# Altium PCB CH32V203G-R0-1v0.PcbDoc
Units mil, origin at the board's own origin, x right, y up, seen from the top; angles counter-clockwise.
Board outline 1496.06 x 2440.94 mil, 2 copper layers (Top Layer, Bottom Layer); 28 components, 39 nets, 142 pads, 298 vias.
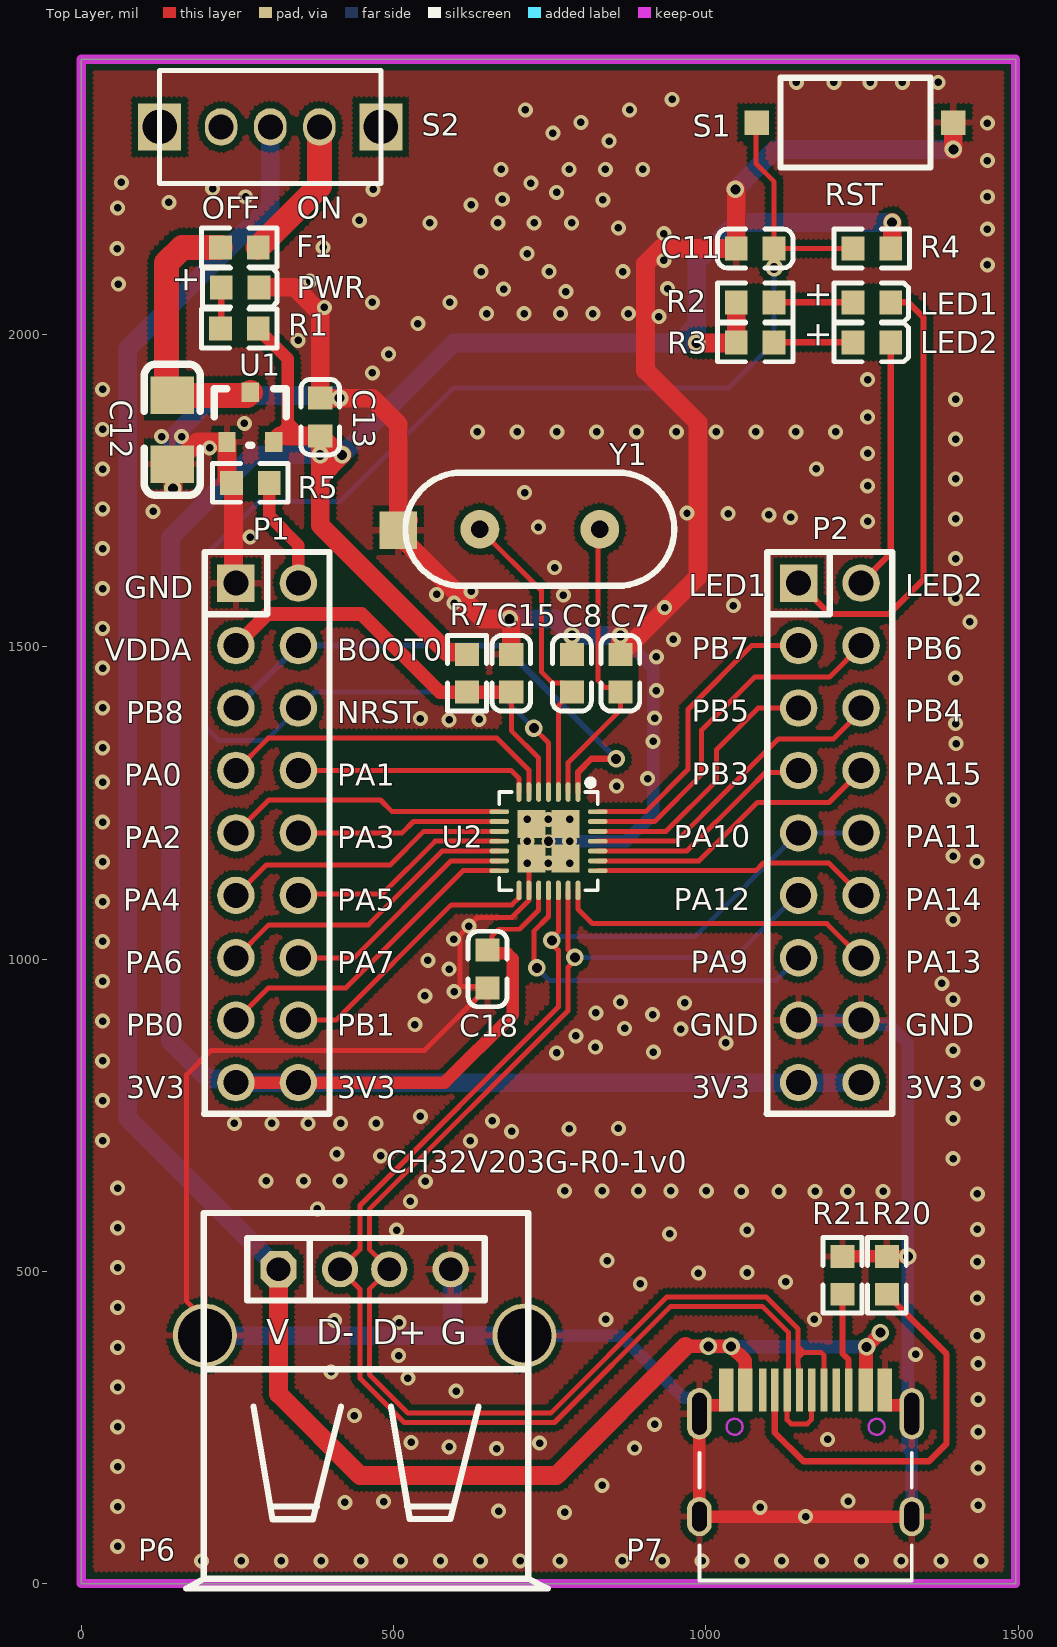
[diagram p0: Top Layer view]
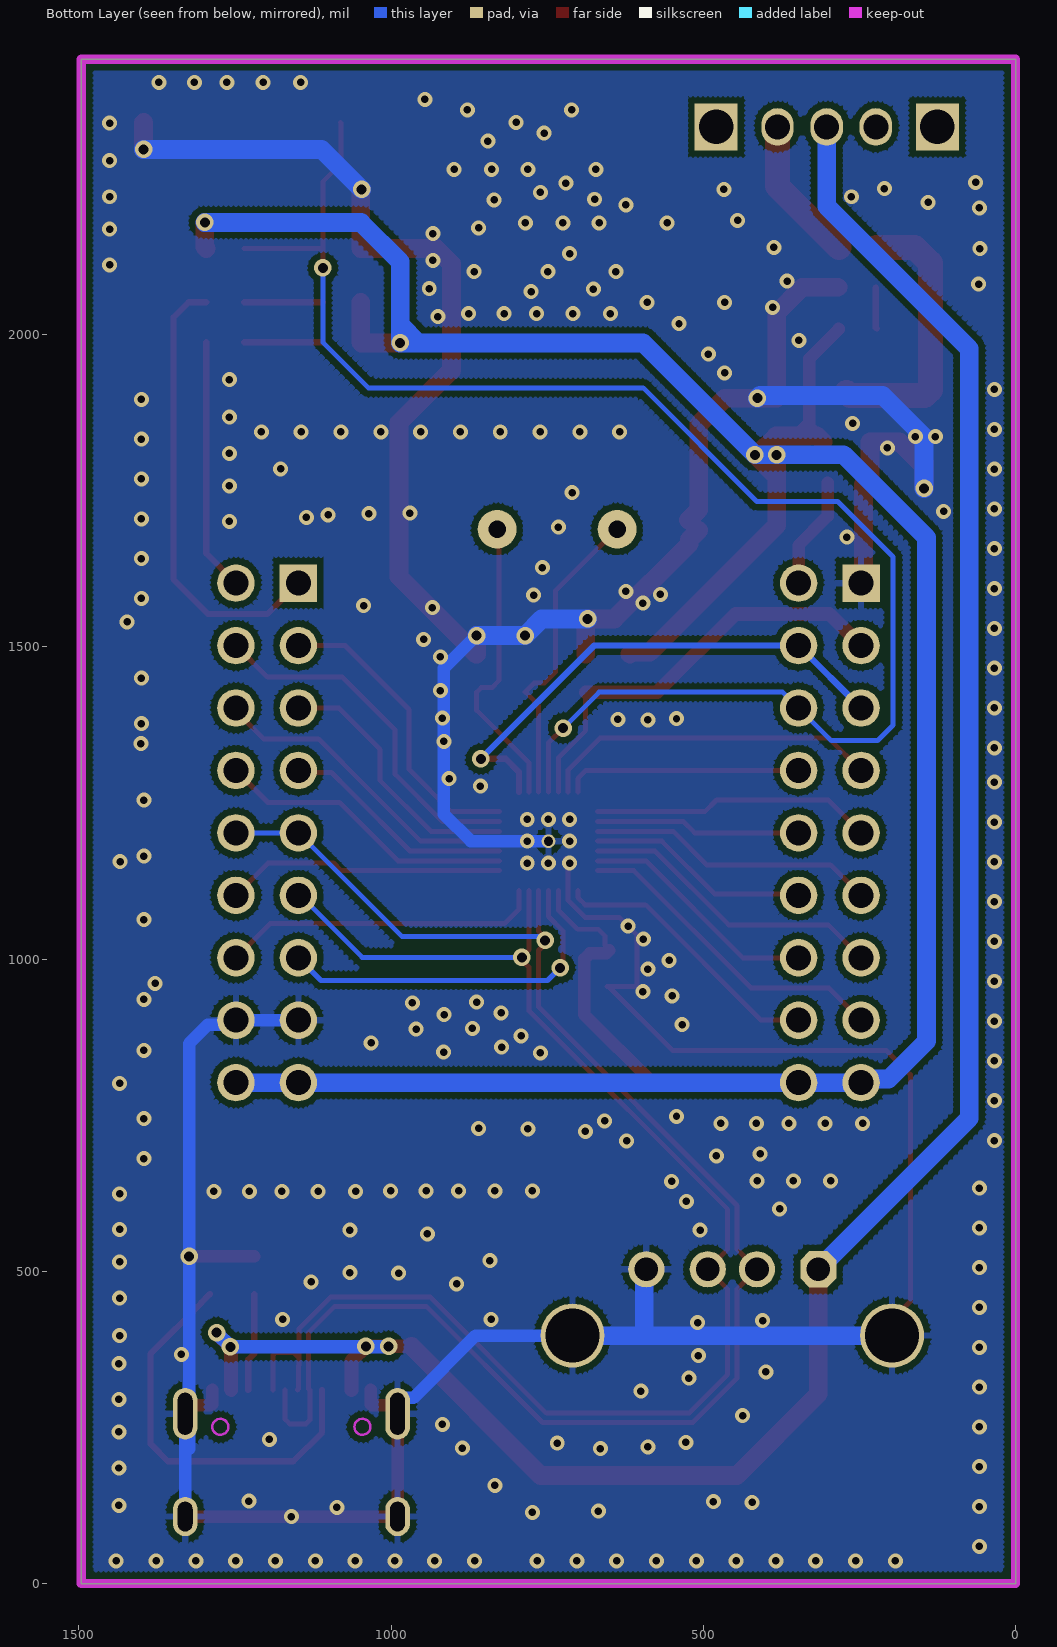
[diagram p1: Bottom Layer view, seen from below]

## Layer stack, top to bottom
Top Solder: solder mask 0.4, Solder Resist, Dk 3.5
Top Layer: signal copper 1.4
Dielectric 1: dielectric 12.6, FR-4, Dk 4.8
Bottom Layer: signal copper 1.4
Bottom Solder: solder mask 0.4, Solder Resist, Dk 3.5

## Board outline
0,0 1496.06,0 1496.06,2440.94 0,2440.94

## Design rules (kind name [scope] priority, off if disabled: settings)
Clearance Clearance_1 [InPolygon] p1: gap=10 ignorepadtopadclearanceinfootprint=FALSE
Clearance [All] p2: gap=6 ignorepadtopadclearanceinfootprint=FALSE
ComponentClearance [All] p1 off: gap=10 collisioncheckmode=3 verticalgap=10 showdistances=FALSE
DiffPairsRouting [All] p1: maxlimit=10 minlimit=7 mostfreqgap=8 toplayer_minwidth=6 toplayer_maxwidth=15 toplayer_prefwidth=8 bottomlayer_minwidth=6 bottomlayer_maxwidth=15 bottomlayer_prefwidth=8 maxuncoupledlength=500
MinimumSolderMaskSliver [All] p1 off: minsoldermaskwidth=10
PolygonConnect PolygonConnect_1 [IsVia] p1: connectstyle=Direct reliefconductorwidth=10 reliefentries=4 polygonreliefangle="90 Angle" airgapwidth=10
PolygonConnect [All] p2: connectstyle=Relief reliefconductorwidth=10 reliefentries=4 polygonreliefangle="90 Angle" airgapwidth=10
RoutingVias [All] p1: holewidth=16 width=28 viastyle="Through Hole" minholewidth=12 minwidth=24 maxholewidth=28 maxwidth=50
SilkToSilkClearance [All] p1 off: silktosilkclearance=10
SilkToSolderMaskClearance [IsPad] p1 off: minsilkscreentomaskgap=10 clearancetoexposedcopper=TRUE
SolderMaskExpansion [All] p1: expansion=4 istentingtop=FALSE
Width [All] p1: maxlimit=100 minlimit=6 preferedwidth=10
25 further rules are at their usual default settings.

## Classes and differential pairs
differential pair NewDifferentialPair1: +PA10 -PA12

## Components (designator, comment, footprint, x,y, rotation, side; value= is the part's Value field where it differs from the comment)
C7 "22pF" 0603_C 863.11,1488.17 r270 top
C8 "22pF" 0603_C 785.55,1488.17 r270 top
C11 "0.1uF" 0603_C 1048.85,2138.1 r0 top
C12 "10uF" 3216_C 145.48,1902.85 r90 top
C13 "2.2uF" 0603_C 382.48,1898.48 r270 top
C15 "0.1uF" 0603_C 688.43,1427.54 r90 top value=15pF
C18 "0.1uF" 0603_C 650.48,953.85 r90 top
F1 "500mA" 0603 283.11,2139.85 r180 top
LED1 "LED1   blue" 0603+ 1235.48,2051.85 r0 top
LED2 "LED2  blue" 0603+ 1235.48,1987.85 r0 top
P1 "HEADER 9x2" IDC18-2.54MM 247.48,1602.17 r0 top
P2 "HEADER 9x2" IDC18-2.54MM 1148.58,1602.17 r0 top
P6 "USB_A" USBAF 315.77,503.31 r0 top
P7 "TYPE-C" TYPE-C-Receptacle-2.0 1159.82,310 r0 top
PWR "POWER  red" 0603+ 223.86,2075.85 r0 top
R1 "1K" 0603 222.48,2009.85 r0 top
R2 "1K" 0603 1048.85,2051.85 r0 top
R3 "1K" 0603 1048.85,1987.85 r0 top
R4 "NC(10K)" 0603 1235.48,2138.1 r0 top value=10K
R5 "4.7K" 0603 300.89,1762.85 r180 top value=10K
R7 "0Ω" 0603 617.48,1488.17 r270 top
R20 "NC(5.1K)" 0603 1289.96,463.23 r90 top
R21 "NC(5.1K)" 0603 1219.09,463.23 r90 top
S1 "RST" SMD_6.1x3.65x2.5mm-KEY 1081.3,2339.76 r0 top
S2 "SW" KEY2 302.48,2332.85 r0 top
U1 "6219P33M" SOT-23 233.08,1828.32 r0 top
U2 "CH32V203G6U" QFN28_4x4 748.03,1188.85 r180 top
Y1 "8M" XT_AT49 638.2,1688.54 r270 top

## Footprints (in the part's own frame and the unit in brackets; to place one, negate y for a bottom-side part, rotate by r counter-clockwise, add the part's x,y. Pads: shape width x height; smd on the part's side, far side on the other; paste and mask are expansions set on the pad)
0603 [mm]
  rect 0.93x0.98 smd: 1(0,0) 2(1.54,0)
  silkscreen extent -0.76,-0.79 2.3,0.79
0603+ [mm]
  rect 0.93x0.98 smd: 1(0,0) 2(1.54,0)
  silkscreen extent -0.76,-0.79 2.27,0.79
0603_C [mm]
  rect 0.93x0.98 smd: 1(0,0) 2(1.54,0)
  silkscreen extent -0.76,-0.79 2.31,0.79
3216_C [mil]
  rect 60x70 smd: 1(0,0) 2(-110,0)
  silkscreen extent -160,-45 50,45
IDC18-2.54MM [mil]
  rect 60x60 hole 40: 1(0,0)
  round 60 hole 40: 2(100,0) 3(0,-100) 4(100,-100) 5(0,-200) 6(100,-200) 7(0,-300) 8(100,-300) 9(0,-400) 10(100,-400) 11(0,-500) 12(100,-500) 13(0,-600) 14(100,-600) 15(0,-700) 16(100,-700) 17(0,-800) 18(100,-800)
  silkscreen extent -51,-850 150,50
KEY2 [mm]
  rect 1.75x1.9 hole 1.4: 0(-4.5,0) 0(4.5,0)
  oval 1.321x1.524 hole 1.016: 1(0,0) 2(-2,0) 3(2,0)
  silkscreen extent -4.51,-2.31 4.5,2.29
QFN28_4x4 [mm]
  rect 1.143x1.143 smd mask+0: 0(-0.699,0.698) 0(-0.698,-0.699) 0(0.699,0.698) 0(0.699,-0.699)
  round 0.559 hole 0.381 mask+0.102: 0(0,0)
  oval 0.2x0.8 smd: 1(-1.2,-2) 2(-0.8,-2) 3(-0.4,-2) 4(0,-2) 5(0.4,-2) 6(0.8,-2) 7(1.2,-2) 15(1.2,2) 16(0.8,2) 17(0.4,2) 18(0,2) 19(-0.4,2) 20(-0.8,2) 21(-1.2,2)
  oval 0.8x0.2 smd: 8(2,-1.2) 9(2,-0.8) 10(2,-0.4) 11(2,0) 12(2,0.4) 13(2,0.8) 14(2,1.2) 22(-2,1.2) 23(-2,0.8) 24(-2,0.4) 25(-2,0) 26(-2,-0.4) 27(-2,-0.8) 28(-2,-1.2)
  silkscreen extent -2,-2.51 2,2
SMD_6.1x3.65x2.5mm-KEY [mm]
  rect 1x1 smd: 1(0,0) 2(8,0)
  silkscreen extent 0.98,-1.83 7.08,1.83
SOT-23 [mm]
  rect 0.7x0.8 smd: 1(0,0) 2(1.9,0) 3(0.95,2.02)
  silkscreen extent -0.51,-0.13 2.41,2.16
TYPE-C-Receptacle-2.0 [mm]
  oval 1x1.6 hole 0.6 slot 1.2 at 90 deg: 0(-4.32,-5.15) 0(4.32,-5.15)
  oval 1x2.1 hole 0.6 slot 1.7 at 90 deg: 0(-4.32,-0.97) 0(4.32,-0.97)
  rect 0.6x1.75 smd: A1(-3.225,0) A4(-2.45,0) B1(3.225,0) B4(2.45,0)
  rect 0.3x1.75 smd: A5(-1.25,0) A6(-0.25,0) A7(0.25,0) A8(1.25,0) B5(1.75,0) B6(0.75,0) B7(-0.75,0) B8(-1.75,0)
  Keep-Out Layer circle w0.1: c-2.89,-1.5 r0.325
  Keep-Out Layer circle w0.1: c2.89,-1.5 r0.325
  silkscreen extent -4.32,-7.75 4.32,-2.55
USBAF [mm]
  round 2.6 hole 2.2: 0(-3,-2.7) 0(10,-2.7)
  oct 1.473x1.473 hole 0.965: 1(0,0)
  round 1.473 hole 0.965: 2(2.5,0) 3(4.5,0) 4(7,0)
  silkscreen extent -3.75,-12.99 10.95,2.29
XT_AT49 [mil]
  rect 60x60 smd: 0(1.69,-130.72)
  round 62 hole 28: 1(0,0) 2(0,192.13)
  silkscreen extent -91,-119 91,311

## Part data
C7 C8 C11 C15 C18: library part Cap, "Capacitor", LatestRevisionDate=17-Jul-2002, LatestRevisionNote="Re-released for DXP Platform.", PackageReference=RAD-0.3, Published=8-Jun-2000, Publisher="Altium Limited"
C12 C13: library part CAP, "Capacitor"
F1: library part FUSE1, "Fuse"
LED1 LED2 PWR: library part LED0, "Typical INFRARED GaAs LED", LatestRevisionDate=08-Jul-2005, LatestRevisionNote="Mech Layer 1 removed.", PackageReference=LED-0, Published=8-Jun-2000, Publisher="Altium Limited"
P1 P2: library part "Header 9X2", "Header, 9-Pin, Dual row", LatestRevisionDate=17-Jul-2002, LatestRevisionNote="Re-released for DXP Platform.", Publisher="Altium Limited"
P6: library part USB, "USB Port"
P7: library part TYPE-C1
R1 R2 R3: library part "Res Semi", "Semiconductor Resistor", LatestRevisionDate=17-Jul-2002, LatestRevisionNote="Re-released for DXP Platform.", PackageReference=AXIAL-0.5, Published=8-Jun-2000, Publisher="Altium Limited"
R4 R5 R7 R20 R21: library part Res2, "Resistor"
  R4 R5 R7: LatestRevisionDate=17-Jul-2002, LatestRevisionNote="Re-released for DXP Platform.", PackageReference=AXIAL-0.4, Published=8-Jun-2000, Publisher="Altium Limited"
S1: library part KEY
U2: "RISC-V LMD-MCU, 144MHz, USB FS, CAN, Mul-ADC,OPA"
Y1: library part XTAL, "Crystal Oscillator", LatestRevisionDate=17-Jul-2002, LatestRevisionNote="Re-released for DXP Platform.", PackageReference=R38, Published=8-Jun-2000, Publisher="Altium Limited"

## Via types
v1: diameter 24, hole 12, Top Layer to Bottom Layer, tented both sides, 276 vias
v2: diameter 28, hole 16, Top Layer to Bottom Layer, tented both sides, 22 vias

## Nets (pads, with @x,y where several pads share a name; then routed paths per layer and width w, separated by ;. In a path a pad name is that pad's centre, name@x,y a point inside that pad or via, vN(x,y) a via of type N, cw(c..) or ccw(c..) an arc to the next point about the centre after c; other vN are vias at no path point)
+5V: P6.1 P7.A4 P7.B4 S2.1 | length 3625.5
  Top Layer w22: 967.48,379.85 v2(1003.98,379.85) v2(1040.48,379.85) 1063.36,356.97 P7.A4 ; v2(1257.48,378.85) 1256.88,378.25 v2@1256.88,377.62 ; v2(1279.48,401.85) 1279.48,400.23 v2@1256.88,377.62 ; v2@1256.88,377.62 1256.88,310.6 P7.B4 1256.28,377.02 v2@1256.88,377.62
  Top Layer w30: P6.1 315.77,303.56 446.48,172.85 760.48,172.85 967.48,379.85
  Bottom Layer w22: v2(1003.98,379.85) 1004.48,379.35 v2@1040.98,379.35 ; v2(1040.48,379.85) v2@1040.98,379.35 ; v2(1279.48,401.85) 1279.48,401.35 1257.48,379.35 v2(1257.48,378.85) 1256.98,379.35 v2@1040.98,379.35
  Bottom Layer w30: S2.1 302.48,2205.85 74,1977.37 74,745.08 P6.1
BOOT0: P1.4 P1.5 U2.1 | length 827.6
  Top Layer w10: U2.1 795.28,1299.65 816.48,1320.85 v2(856.48,1320.85)
  Bottom Layer w10: P1.5 P1.4 675.16,1502.17 v2(856.48,1320.85)
GND: C7.1 C8.1 C11.1 C12.2 C13.1 C15.2 C18.1 P1.1 P2.15 P2.16 P6.0 P6.4 P7.0 P7.A1 P7.B1 PWR.2 R5.2 R20.2 R21.2 S1.2 U1.1 U2.0 U2.16 Y1.0 | length 7732.9
  Top Layer w8: P6.0@197.66,397.01 197.66,422.34 168.48,451.52 168.48,814.85 207.48,853.85 549.5,853.85 649.5,953.85 C18.1 ; C18.1@654.48,955.85 610,955.85 606.48,959.37 606.48,1038.85 634.48,1066.85 689.48,1066.85 716.47,1093.84 716.47,1110.05 U2.16 716.54,1157.35 U2.0@720.53,1161.35
  Top Layer w20: P7.A1 1032.85,287.36 1031.04,285.55 998.69,285.55 989.74,276.6 989.74,271.81 989.74,107.24 P7.0@1329.9,107.24 ; R21.2 v2(1323.48,523.85) ; P7.B1 1286.79,287.36 1288.6,285.55 1320.95,285.55 1329.9,276.6 P7.0@1329.9,271.81
  Top Layer w30: v2(146.48,1753.85) 146.48,1791.85 C12.2 150.48,1792.85 185.95,1828.32 U1.1 233.08,1771.02 240.26,1763.83 R5.2 243.57,1759.54 243.57,1606.08 P1.1 ; PWR.2 341.48,2075.85 382.48,2034.85 C13.1 v2(413.58,1898.48) 465.85,1898.48 507.48,1856.85 507.48,1766.85 507.48,1719.85 Y1.0@523.98,1703.35 ; Y1.0 522.48,1671.85 522.48,1664.85 642.48,1544.85 v2(685.48,1544.85) 688.43,1541.91 C15.2 ; v2(863.11,1518.29) C7.1 864.09,1488.17 867.4,1491.48 867.4,1492.46 987.48,1612.54 987.48,1858.85 903.48,1942.85 903.48,2113.85 927.73,2138.1 C11.1 1048.85,2231.48 v2(1047.48,2232.85) ; S1.2 1396.48,2339.54 v2(1396.48,2296.85)
  Bottom Layer w20: P6.0@709.47,397.01 864.54,397.01 964.38,297.17 980.79,297.17 989.74,288.22 P7.0@989.74,271.81 ; U2.0@748.03,1188.85 v1(782.03,1188.85) 872.48,1188.85 915.48,1231.85 915.48,1465.92 v2(863.11,1518.29) ; P2.15 P2.16 1256.24,894.52 1293.81,894.52 1323.48,864.85 v2(1323.48,523.85) 1323.48,216.02 1329.9,209.61 ; P7.0@1329.9,107.24 1329.9,209.61 ; P7.0@1329.9,271.81 1329.9,209.61
  Bottom Layer w30: v2(146.48,1753.85) 146.48,1836.25 213.08,1902.85 409.21,1902.85 v2(413.58,1898.48) ; P6.0@197.66,397.01 594.48,397.01 ; P6.4 594.48,500.19 594.48,397.01 ; v2(685.48,1544.85) 758.99,1544.85 v2(785.55,1518.29) v2(863.11,1518.29) ; P6.0@709.47,397.01 594.48,397.01 ; v2(1047.48,2232.85) 1111.48,2296.85 v2(1396.48,2296.85)
  other v1: 192.5,36.21 256.27,36.21 320.03,36.21 383.79,36.21 447.56,36.21 511.32,36.21 575.08,36.21 638.85,36.21 702.61,36.21 766.38,36.21 866.5,36.21 930.27,36.21 994.03,36.21 1057.79,36.21 1121.56,36.21 1185.32,36.21 1249.08,36.21 1312.85,36.21 1376.61,36.21 1440.38,36.21 57.79,59.5 1159.82,107.24 774,114 668,116 1087,122 57.79,123.27 1436,125 422,130 484,131 1228,132 834,157 1436,185 57.79,187.03 665,216 886,217 589,219 734,225 528,226 1195,231 1436,243 57.79,250.79 918,255 437,269 1436,295 600,308 57.79,314.56 523,329 400,339 1436,352 508,365 1336,367 57.79,378.32 1435,397 509,418 405,421 840,423 1174,423 57.79,442.08 1435,457 895,480 1128,483 988,497 1066,498 57.79,505.85 1435,515 842,517 942,560 505,566 1066,566 1435,567 57.79,569.61 378,600 527,612 1435,624 1057,628 1117,628 1175,628 1227,628 1284,628 774,629 834,629 892,629 944,629 1001,629 57.79,633.38 551,644 296,645 356,645 414,645 1396.21,680.62 479,685 409,688 623,709 33.79,709.5 689,724 781,728 860,729 245,737 305,737 363,737 415,737 472,737 658,741 1396.21,744.39 543,748 33.79,773.27 1435,801 33.79,837.03 761,850 916,851 1396,854 823,859 1032,866 792,877 960,888 870,889 534,895 33.79,900.79 915,911 824,914 966,930 863,931 1396.21,935.68 550,941 597,948 1378,961 33.79,964.56 589,984 555,998 33.79,1028.32 596,1032 620.48,1052.85 1396.21,1063.21 33.79,1092.08 714.03,1153.85 748.03,1153.85 782.03,1153.85 33.79,1155.85 1434,1156 1396,1165 714.03,1188.85 33.79,1219.61 714.03,1223.85 748.03,1223.85 782.03,1223.85 1396.21,1254.5 857,1277 33.79,1283.38 907,1289 33.79,1338.5 1401,1345 915.48,1348.89 1400,1377 589,1383 637,1384 543,1385 918,1386 33.79,1402.27 921,1430 1400.21,1450.15 33.79,1466.03 921,1484 948,1512 33.79,1529.79 1423,1540 934,1563 1044,1566 597,1570 1400.21,1577.68 772,1583 569,1584 624,1589 33.79,1593.56 758,1627 1400.21,1641.44 33.79,1657.32 270,1676 732,1692 1259,1701 1400.21,1705.21 1135.87,1707.34 1100.87,1711.34 1035.87,1713.34 969.87,1714.34 115,1717 33.79,1721.08 710,1747 1259,1758 1400.21,1768.97 33.79,1784.85 1177,1785 1259,1810 205.3,1818.85 1400.21,1832.73 128.48,1836.85 160.48,1836.85 634,1844.34 697.76,1844.34 761.53,1844.34 825.29,1844.34 889.05,1844.34 952.82,1844.34 1016.58,1844.34 1080.35,1844.34 1144.11,1844.34 1207.87,1844.34 33.79,1848.61 260.86,1858.07 1259,1868 1400.21,1896.5 33.79,1912.38 1259,1928 466,1939 492,1969 347,1991 539,2018 925,2029 649,2034 709,2034 767,2034 819,2034 876,2034 389,2044 466,2052 590,2052 776,2069 676,2073 939,2074 59,2081 366,2086 640,2101 749,2101 867,2101 1451,2112 933,2119 714,2130 57,2138 387,2140 933,2162 1451,2169 860,2171 558,2179 667,2179 725,2179 785,2179 445,2183 58,2203 624,2208 140,2212 835,2216 674,2217 263,2221 1451,2221 761,2228 467,2233 210,2234 720,2243 64,2244 672,2265 781,2265 839,2265 899,2265 1451,2279 845,2310 755,2323 1451,2339 800,2340 711,2360 878,2360 946,2377 1145,2404 1205,2404 1263,2404 1315,2404 1372,2404
LED1: LED1.2 P2.1 | length 725.4
  Top Layer w10: P2.1 1197.91,1552.85 1293.48,1552.85 1348.48,1607.85 1348.48,2027.85 1324.48,2051.85 LED1.2
LED2: LED2.2 P2.2 | length 405.4
  Top Layer w10: P2.2 1296.11,1649.7 LED2.2
NetC12_1: C12.1 F1.2 U1.3 | length 439.2
  Top Layer w40: F1.2 161.48,2139.85 136.48,2114.85 136.48,1911.85 C12.1 265.48,1902.85 U1.3
NetF1_1: F1.1 S2.3 | length 233.6
  Top Layer w40: F1.1 381.22,2237.96 S2.3
NetLED1_1: LED1.1 R2.2 | length 126
  Top Layer w10: R2.2 LED1.1
NetLED2_1: LED2.1 R3.2 | length 126
  Top Layer w10: R3.2 LED2.1
NetP1_2: P1.2 R5.1 | length 180
  Top Layer w20: R5.1 300.89,1709.44 347.48,1662.85 P1.2
NetP7_A5: P7.A5 R20.1 | length 653.3
  Top Layer w10: P7.A5 1110.61,241.72 1156.48,195.85 1357.48,195.85 1385.48,223.85 1385.48,367.71 1304.25,448.94 1304.25,449.92 1290.95,463.23 R20.1
NetP7_B5: P7.B5 R21.1 | length 157.2
  Top Layer w10: R21.1 1219.09,368.24 1228.72,358.61 P7.B5
NetPWR_1: PWR.1 R1.1 | length 66.6
  Top Layer w10: R1.1 223.86,2011.23 PWR.1
NRST: C11.2 P1.6 R4.1 S1.1 U2.4 | length 2522.2
  Top Layer w8: v2(724.48,1369.85) 748.03,1346.3 U2.4 ; S1.1 1080.48,2338.94 1080.48,2273.85 1109.48,2244.85 C11.2 ; v2(1109.38,2107) 1109.38,2138 C11.2 ; R4.1 C11.2
  Bottom Layer w8: v2(724.48,1369.85) 666.79,1427.54 372.85,1427.54 295.16,1349.85 221.15,1349.85 196,1375 196,1644 284.85,1732.85 414.48,1732.85 596.48,1914.85 1036.48,1914.85 1109.38,1987.75 v2(1109.38,2107)
PA0: P1.7 U2.6 | length 546.8
  Top Layer w8: P1.7 299.16,1353.85 665.48,1353.85 716.54,1302.8 U2.6
PA1: P1.8 U2.7 | length 380.5
  Top Layer w8: P1.8 688.16,1302.17 700.79,1289.54 U2.7
PA2: P1.9 U2.8 | length 451.4
  Top Layer w8: P1.9 300.16,1254.85 478.97,1254.85 497.72,1236.09 U2.8
PA3: P1.10 U2.9 | length 329.3
  Top Layer w8: P1.10 513.8,1202.17 531.98,1220.35 U2.9
PA4: P1.11 U2.10 | length 464.2
  Top Layer w8: P1.11 296.16,1150.85 494.48,1150.85 548.23,1204.6 U2.10
PA5: P1.12 U2.11 | length 357.7
  Top Layer w8: P1.12 349.64,1104.34 481.97,1104.34 566.48,1188.85 U2.11
PA6: P1.13 U2.12 | length 492.6
  Top Layer w8: P1.13 300.16,1054.85 459.48,1054.85 577.73,1173.1 U2.12
PA7: P1.14 U2.13 | length 386.1
  Top Layer w8: P1.14 436.8,1002.17 591.98,1157.35 U2.13
PA9: P2.13 U2.18 | length 578.5
  Top Layer w8: v2(729.48,985.85) 725.65,989.68 725.65,998.19 724.48,999.37 724.48,1044.85 748.03,1068.4 U2.18
  Bottom Layer w8: v2(729.48,985.85) 749.48,965.85 1112.26,965.85 P2.13
PA10: P2.9 P2.10 P6.2 P7.A7 P7.B7 U2.19 | length 2558
  Top Layer w8: U2.19 763.78,1098.43 764.15,1098.05 764.15,1044.85 753.48,1034.18 v2(753.48,1029.85) 753.48,1024.44 764.15,1013.77 764.15,923.52 446.07,605.44 446.07,535.18 P6.2 446.07,471.44 446.07,328.64 516.85,257.85 757.69,257.85 943.69,443.85 1090.48,443.85 1132.63,401.7 1132.63,379.35 1132.63,370.34 1132.63,349.98 1132.2,349.55 1132.2,311.91 P7.B7 1130.29,262.04 1136.48,255.85 1162.48,255.85 1169.66,263.03 P7.A7
  Bottom Layer w8: v2(753.48,1029.85) 758.89,1029.85 764.89,1035.85 982.26,1035.85 P2.9 P2.10
PA12: P2.11 P6.3 P7.A6 P7.B6 U2.20 | length 2376.3
  Top Layer w8: U2.20 779.53,1098.42 779.15,1098.05 779.15,1015.18 790.48,1003.85 v2(790.48,1002.85) 790.48,998.44 779.15,987.11 779.15,917.31 461.07,599.22 461.07,535.18 P6.3 461.07,471.44 461.07,334.85 523.07,272.85 751.48,272.85 937.48,458.85 1096.69,458.85 1147.63,407.91 1147.63,379.35 ; P7.A6 1148.07,311.91 1148.07,349.55 1147.63,349.98 1147.63,361.33 ; P7.B6 1189.35,365.65 1184.66,370.34 1156.65,370.34 ; 1147.63,361.33 1156.65,370.34 ; 1147.63,361.33 1147.63,370.34 ; 1147.63,370.34 1156.65,370.34 ; 1147.63,370.34 1147.63,379.35 ; 1147.63,379.35 1156.65,370.34
  Bottom Layer w8: v2(790.48,1002.85) 1046.48,1002.85 1145.8,1102.17 P2.11
PA13: P2.14 U2.21 | length 515.6
  Top Layer w8: U2.21 795.28,1080.06 818.48,1056.85 1193.91,1056.85 P2.14
PA14: P2.12 U2.22 | length 448.3
  Top Layer w8: U2.22 1080.24,1141.61 1092.48,1153.85 1196.91,1153.85 P2.12
PA15: P2.8 U2.23 | length 481.8
  Top Layer w8: U2.23 988.98,1157.35 1082.48,1250.85 1197.26,1250.85 P2.8
PB0: P1.15 U2.14 | length 521
  Top Layer w8: P1.15 299.16,953.85 423.48,953.85 611.24,1141.61 U2.14
PB1: P1.16 U2.15 | length 446.3
  Top Layer w8: P1.16 407.8,902.17 592.48,1086.85 689.21,1086.85 700.79,1098.42 U2.15
PB3: P2.7 U2.24 | length 375.3
  Top Layer w8: U2.24 969.73,1173.1 1066.48,1269.85 1095.48,1298.85 1145.26,1298.85 P2.7
PB4: P2.6 U2.25 | length 513.2
  Top Layer w8: U2.25 952.48,1188.85 1036.48,1272.85 1116.48,1352.85 1204.48,1352.85 1248.58,1396.95 P2.6
PB5: P2.5 U2.26 | length 432.9
  Top Layer w8: U2.26 936.23,1204.6 1017.48,1285.85 1017.48,1335.85 1083.8,1402.17 P2.5
PB6: P2.4 U2.27 | length 580.1
  Top Layer w8: U2.27 917.98,1220.35 993.48,1295.85 993.48,1366.85 1078.48,1451.85 1198.26,1451.85 P2.4
PB7: P2.3 U2.28 | length 488.3
  Top Layer w8: U2.28 903.72,1236.09 971.48,1303.85 971.48,1399.85 1073.8,1502.17 P2.3
PD0: C7.2 U2.2 Y1.2 | length 480.5
  Top Layer w8: U2.2 779.53,1314.9 863.11,1398.48 C7.2 855.8,1434.85 838.48,1434.85 827.48,1445.85 Y1.2@827.48,1688.54
PD1: C8.2 U2.3 Y1.1 | length 501.3
  Top Layer w8: Y1.1 736.48,1590.27 736.48,1460.08 754.71,1441.85 771.24,1441.85 C8.2 784.57,1427.54 770.26,1413.24 770.26,1412.25 763.78,1405.77 U2.3
VCC: C13.2 C18.2 P1.17 P1.18 P2.17 P2.18 R1.2 R2.1 R3.1 R4.2 R7.1 U1.2 U2.17 | length 5311.4
  Top Layer w8: C18.2 657.9,1021.9 657.9,1037.27 668.48,1047.85 701.48,1047.85 732.28,1078.65 U2.17
  Top Layer w20: P1.17 P1.18 581.8,802.17 690.48,910.85 690.48,1000.56 681.69,1009.35 655.62,1009.35 C18.2 ; R1.2 283.11,2008.87 330.48,1961.5 330.48,1858.75 ; U1.2@307.88,1830.29 322.96,1845.37 330.48,1852.89 ; 330.48,1837.85 330.48,1850.45 330.48,1852.89 ; 351.38,1837.85 340.93,1848.3 330.48,1858.75 ; 330.48,1852.89 330.48,1858.75
  Top Layer w30: U1.2 308.35,1828.32 U1.2@317.88,1837.85 ; 330.48,1837.85 351.38,1837.85 C13.2 ; R7.1 614.17,1491.48 585.85,1491.48 382.48,1694.85 382.48,1772.85 ; v2(985.48,1986.85) 1047.85,1986.85 R3.1 R2.1 ; R4.2 1298.48,2140.47 v2(1298.48,2179.85) ; 382.48,1772.85 v2(417.36,1807.73) v2@413.58,1807.73 ; 382.48,1772.85 v2(382.48,1807.73) ; v2(382.48,1807.73) v2@413.58,1807.73 ; v2(382.48,1807.73) C13.2 ; C13.2 383.46,1837.85 v2@413.58,1807.73
  Bottom Layer w30: 985.48,2051.85 985.48,2015.85 ; P2.18 P2.17 P1.18 P1.17 241.74,807.91 203.42,807.91 142.48,868.85 142.48,1674.85 275.36,1807.73 v2(382.48,1807.73) v2(417.36,1807.73) 596.48,1986.85 956.48,1986.85 ; v2(1298.48,2179.85) 1048.48,2179.85 985.48,2116.85 985.48,2015.85 ; 956.48,1986.85 v2(985.48,1986.85) 985.48,2015.85 ; 956.48,1986.85 985.48,2015.85
VDDA: C15.1 P1.3 R7.2 U2.5 | length 692
  Top Layer w8: C15.1 688.43,1365.91 732.28,1322.05 U2.5
  Top Layer w22: P1.3 298.16,1552.85 448.48,1552.85 573.79,1427.54 R7.2 C15.1
pads on no net: P7.A8 P7.B8 S2.0 S2.2

## Polygon pours and split planes (outlines as drawn)
GND on Top Layer "GND" (hatched 90Degree grid 8 track 8, remove dead copper, pour order 0): 0,2440.94 0,0 1496.06,0 1496.06,2440.94
GND on Bottom Layer "GND" (hatched 90Degree grid 8 track 8, remove dead copper, pour order 1): 0,2440.94 0,0 1496.06,0 1496.06,2442.06 1503,2449

## Keep-outs
Keep-Out Layer:
  the board outline again, w15

## Silkscreen, mask and mechanical layers (free items; w line width, h text height)
Top Overlay:
  text "OFF" at 192.48,2185.85 h35
  text "ON" at 344.48,2185.85 h35
  text "LED1" at 972.64,1580.85 h35
  text "LED2" at 1319.48,1580.85 h35
  text "GND" at 68.48,1577.85 h35
  text "PB7" at 977.81,1480.35 h35
  text "PB6" at 1319.48,1480.35 h35
  text "VDDA" at 37.65,1477.73 h35
  text "BOOT0" at 409.48,1477.73 h35
  text "PB5" at 977.81,1379.85 h35
  text "PB4" at 1319.48,1379.85 h35
  text "PB8" at 72.15,1377.6 h35
  text "NRST" at 409.48,1377.6 h35
  text "PB3" at 977.81,1279.35 h35
  text "PA15" at 1319.48,1279.35 h35
  text "PA0" at 68.48,1277.48 h35
  text "PA1" at 409.48,1277.48 h35
  text "PA10" at 948.48,1178.85 h35
  text "PA11" at 1319.48,1178.85 h35
  text "PA2" at 68.48,1177.35 h35
  text "PA3" at 409.48,1177.35 h35
  text "PA12" at 948.48,1078.35 h35
  text "PA14" at 1319.48,1078.35 h35
  text "PA4" at 66.81,1077.23 h35
  text "PA5" at 409.48,1077.23 h35
  text "PA9" at 975.81,977.85 h35
  text "PA13" at 1319.48,977.85 h35
  text "PA6" at 70.15,977.1 h35
  text "PA7" at 409.48,977.1 h35
  text "PB0" at 72.15,876.98 h35
  text "PB1" at 409.48,876.98 h35
  text "GND" at 974.14,877.35 h35
  text "GND" at 1319.48,877.35 h35
  text "3V3" at 72.15,776.85 h35
  text "3V3" at 409.48,776.85 h35
  text "3V3" at 977.81,776.85 h35
  text "3V3" at 1319.48,776.85 h35
  text "CH32V203G-R0-1v0" at 488.34,657.85 h35
Mechanical 1:
  the board outline again, w10

## Text inside footprints (layer, text, board x,y; h text height)
LED1: Top Overlay "+" at 1197.4,2040.86 h40 r90
LED2: Top Overlay "+" at 1197.4,1976.86 h40 r90
P6: Top Overlay "G" at 575.77,383.31 h40; Top Overlay "V" at 295.77,383.31 h40; Top Overlay "D+" at 465.77,383.31 h40; Top Overlay "D-" at 375.77,383.31 h40
PWR: Top Overlay "+" at 185.78,2064.86 h40 r90